# Altium PCB PCB1.PcbDoc
Units mm, origin at the board's own origin, x right, y up, seen from the top; angles counter-clockwise.
Board outline 50.16 x 26.29 mm, 4 copper layers (Top Layer, VCC, GND, Bottom Layer), stack 0.603 mm thick; 42 components, 30 nets, 169 pads, 31 vias.
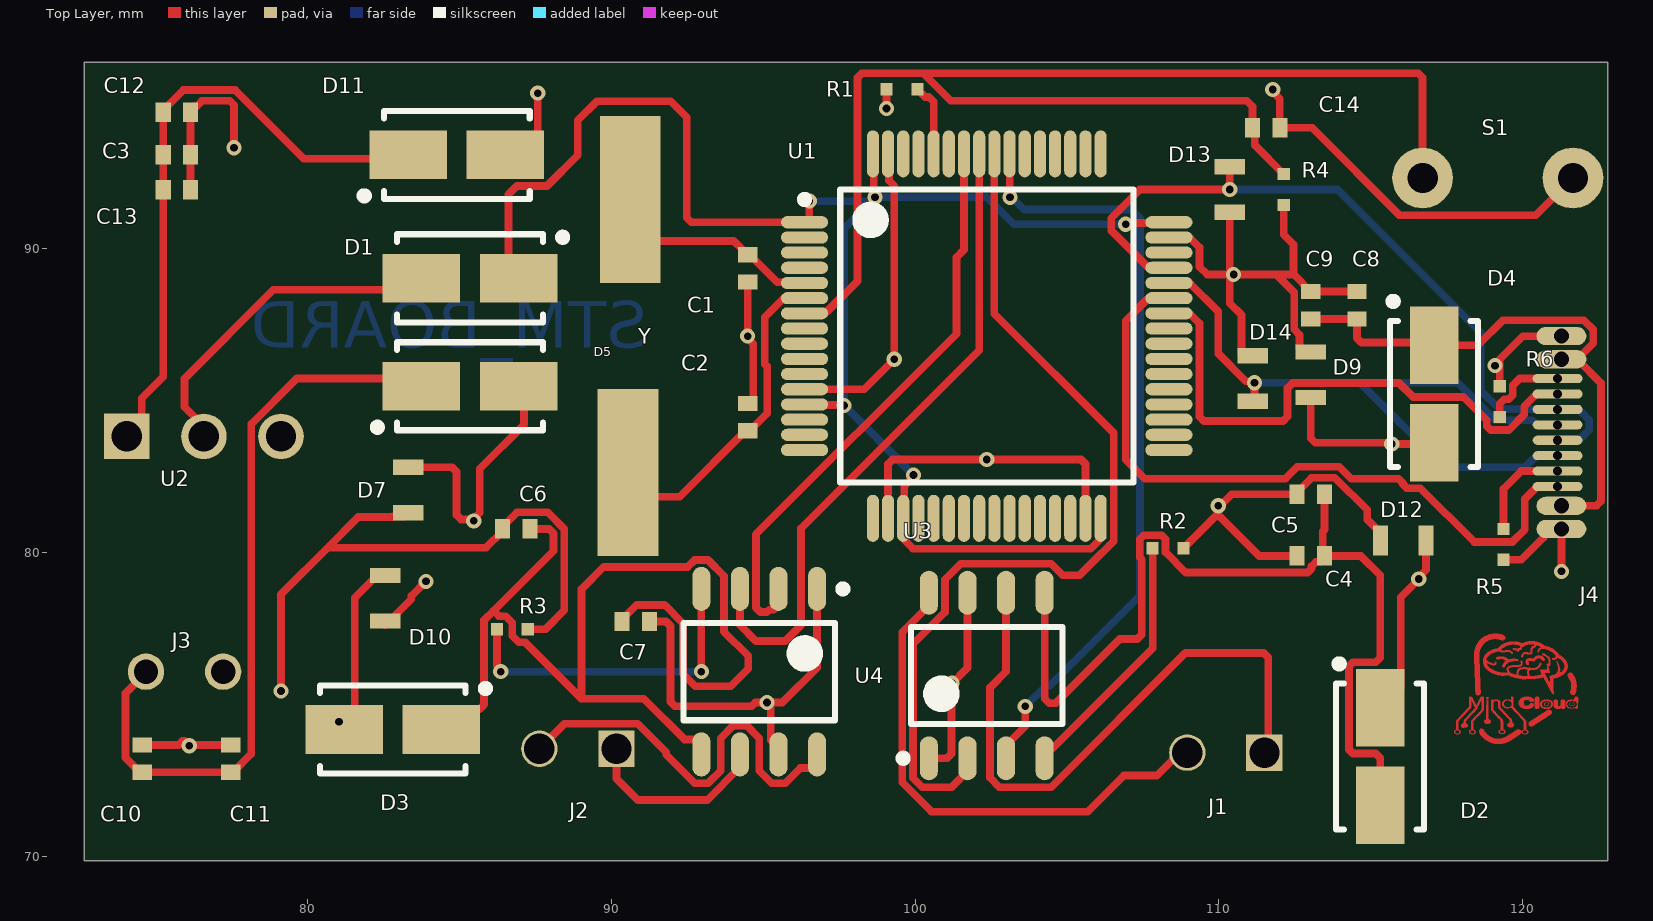
[diagram p0: Top Layer view]
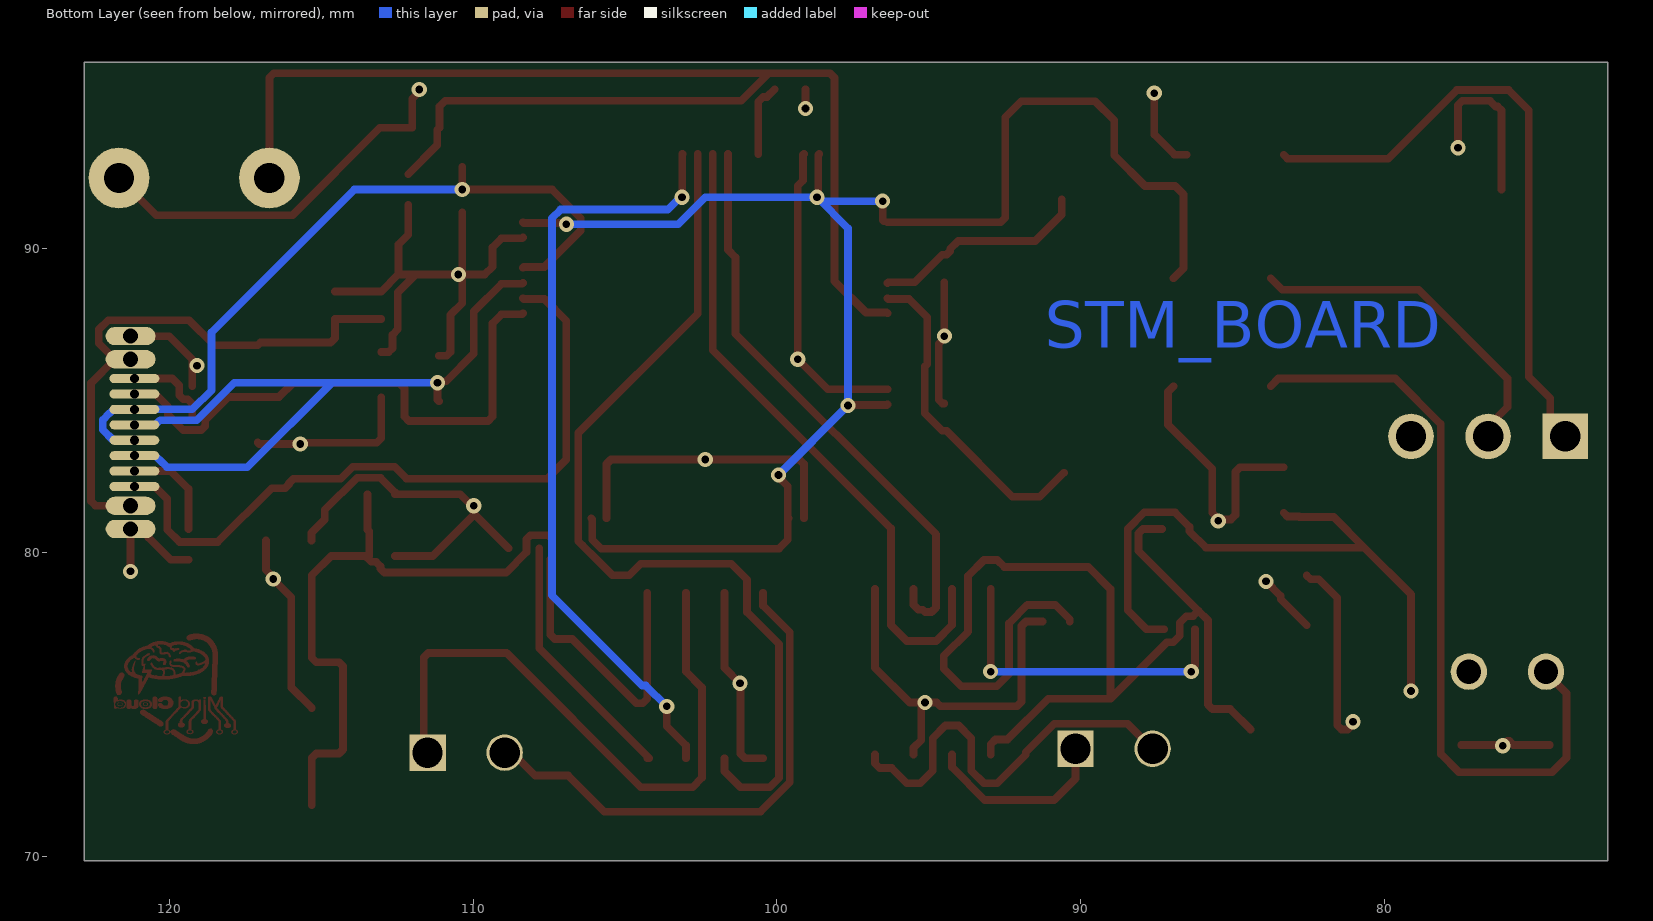
[diagram p1: Bottom Layer view, seen from below]
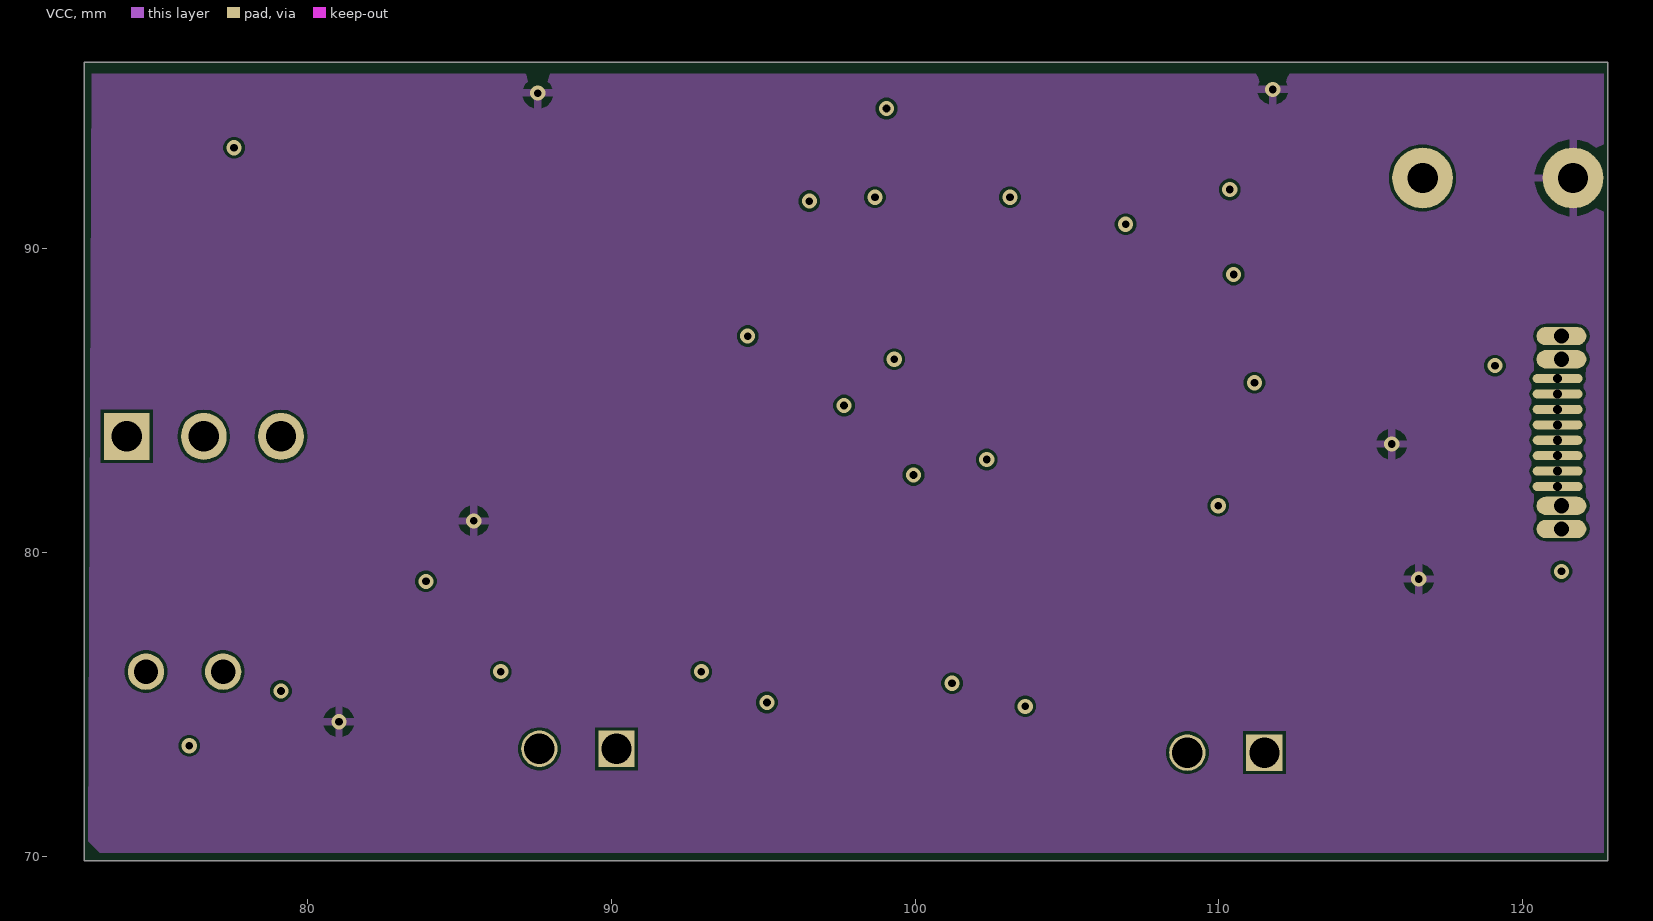
[diagram p2: VCC]
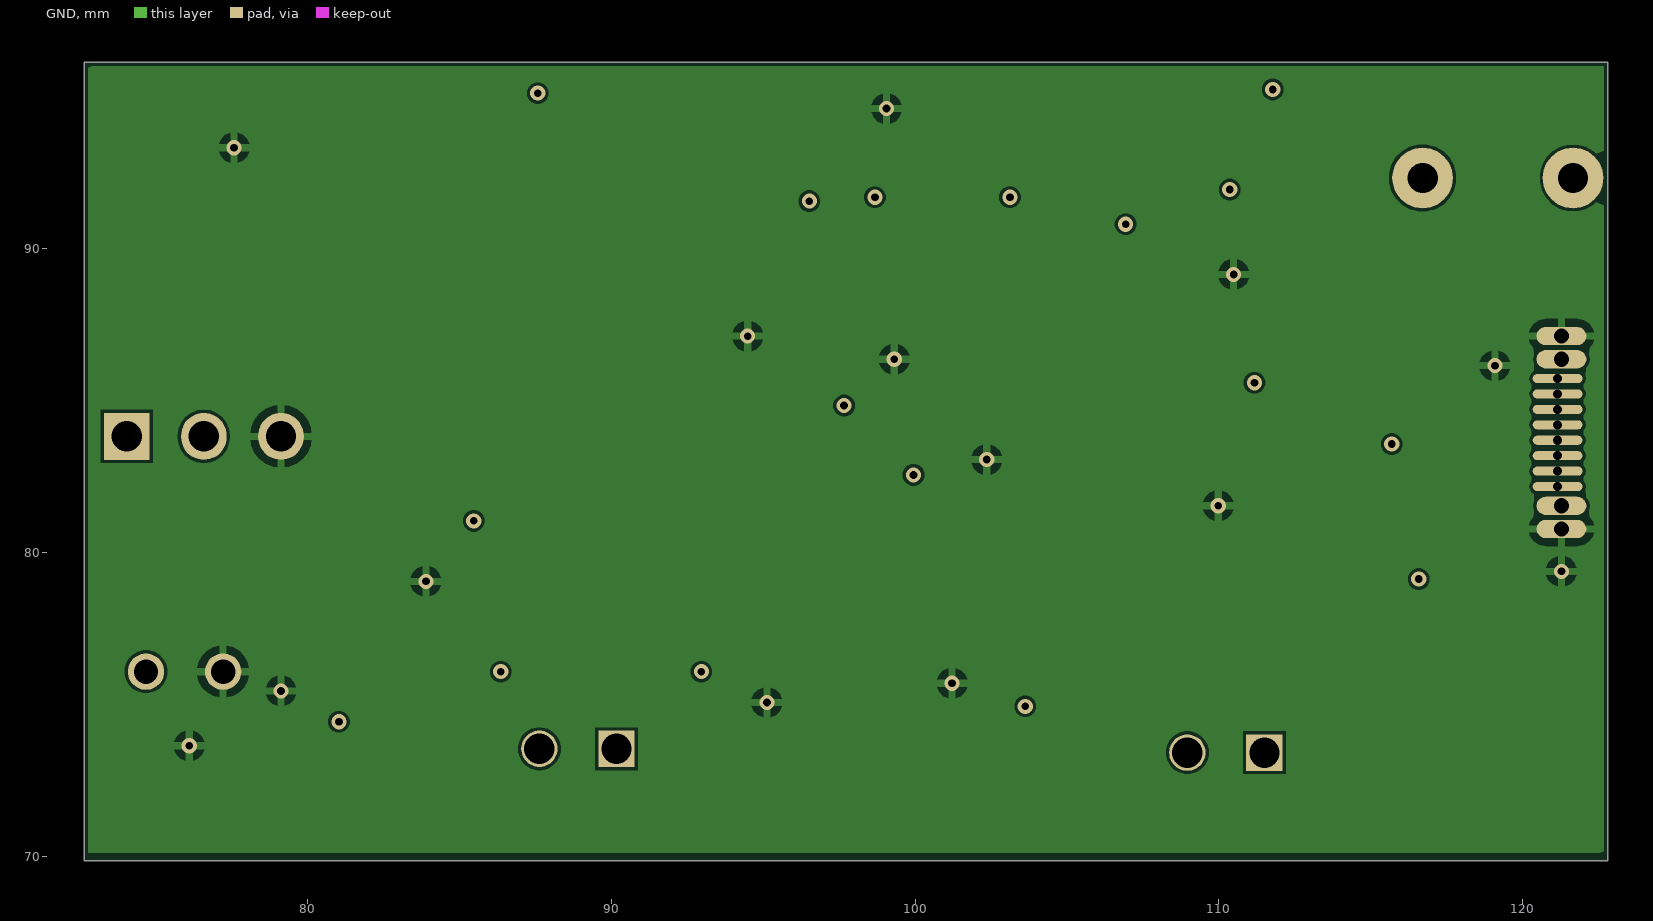
[diagram p3: GND]
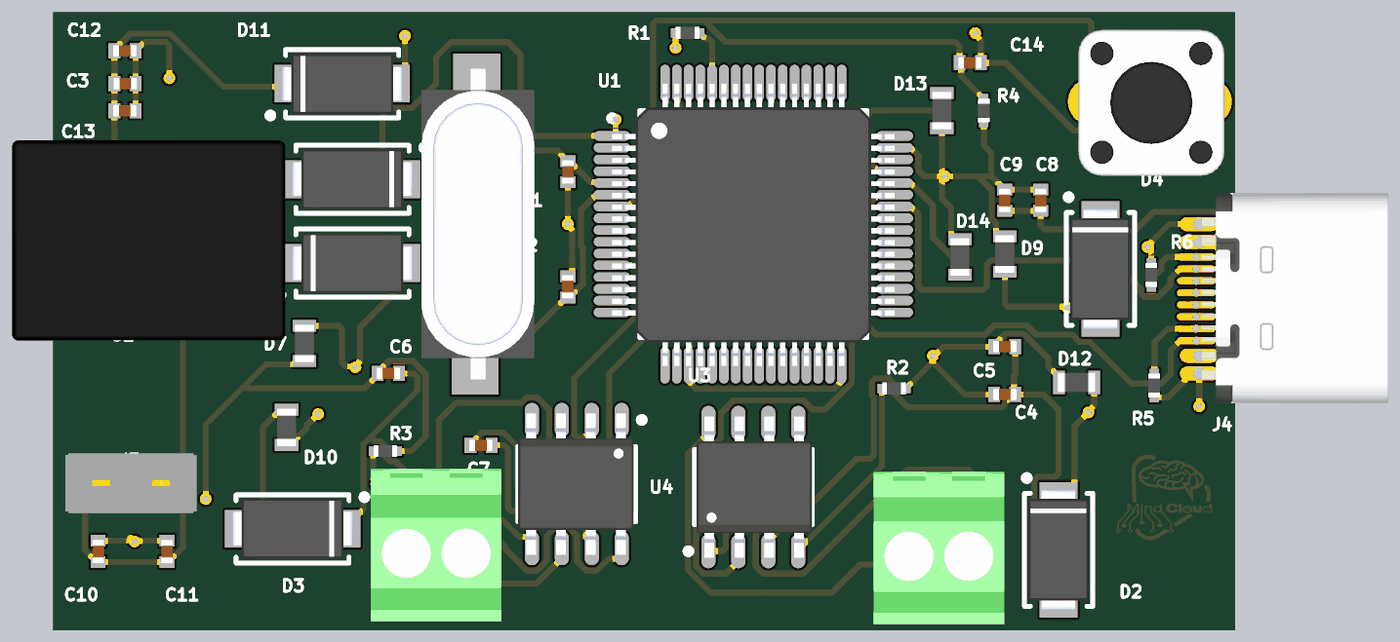
[diagram p4: 3D render of the assembled board from above, using the file's embedded part models]

## Layer stack, top to bottom
Top Solder: solder mask 0.0102, Solder Resist, Dk 3.5
Top Layer: signal copper 0.0356
Dielectric 2: prepreg 0.0711, PP-006, Dk 4.1
VCC: signal copper 0.035
Dielectric 1: dielectric 0.32, FR-4, Dk 4.8
GND: signal copper 0.035
Dielectric 3: prepreg 0.0711, PP-006, Dk 4.1
Bottom Layer: signal copper 0.0356
Bottom Solder: solder mask 0.0102, Solder Resist, Dk 3.5

## Board outline
72.644,69.85 122.809,69.85 122.809,96.139 72.644,96.139

## Design rules (kind name [scope] priority, off if disabled: settings)
Clearance [All] p1: gap=0.1 ignorepadtopadclearanceinfootprint=FALSE
PolygonConnect [All] p1: connectstyle=Relief reliefconductorwidth=0.254 reliefentries=4 polygonreliefangle="90 Angle" airgapwidth=0.254
RoutingVias [All] p1: holewidth=0.711 width=1.27 viastyle="Through Hole" minholewidth=0.711 minwidth=1.27 maxholewidth=0.711 maxwidth=1.27
SolderMaskExpansion [All] p1: expansion=0.102 istentingtop=FALSE
SupplyNets "Schematic Supply Nets_2" [InNet('VCC')] p1: voltage=0.000
SupplyNets "Schematic Supply Nets_1" [InNet('GND')] p2: voltage=0.000
SupplyNets "Schematic Supply Nets" [InNet('+3.3')] p3: voltage=0.000
UnRoutedNet UnRoutedNet_1 [All] p1:
UnRoutedNet [All] p2:
Width [All] p1: maxlimit=0.254 minlimit=0.254 preferedwidth=0.254
29 further rules are at their usual default settings.

## Components (designator, comment, footprint, x,y, rotation, side; value= is the part's Value field where it differs from the comment)
C1 "22pF" CAPACITOR 94.488,89.35 r270 top
C2 "22pF" CAPACITOR 94.488,84.455 r90 top
C3 "10uF" CAPACITOR 75.692,93.091 r0 top
C4 "4.7uF" CAPACITOR 113.03,79.883 r0 top
C5 "0.1uF" CAPACITOR 113.03,81.915 r0 top
C6 "4.7uF" CAPACITOR 86.868,80.772 r0 top
C7 "0.1uF" CAPACITOR 90.805,77.724 r180 top
C8 "0.1uF" CAPACITOR 114.554,88.138 r270 top
C9 "4.7uF" CAPACITOR 113.03,88.138 r270 top
C10 "4.7uF" CAPACITOR 74.549,73.21 r270 top
C11 "0.1uF" CAPACITOR 77.47,73.21 r270 top
C12 "0.1uF" CAPACITOR 75.692,94.488 r180 top
C13 "4.7uF" CAPACITOR 75.692,91.948 r180 top
C14 "0.1uF" CAPACITOR 111.564,93.98 r180 top
D1 "DIODE" DIODE 85.344,89.027 r0 top
D2 "DIODE" DIODE 115.316,73.279 r90 top
D3 "DIODE" DIODE 82.804,74.168 r0 top
D4 "DIODE" DIODE 117.094,85.217 r90 top
D5 "DIODE" DIODE 85.344,85.471 r180 top
D7 "TVS DIODE" "TVS DIODE" 83.312,82.054 r90 top
D9 "TVS DIODE" "TVS DIODE" 113.03,85.852 r90 top
D10 "TVS DIODE" "TVS DIODE" 82.55,78.486 r90 top
D11 "DIODE" DIODE 84.912,93.091 r180 top
D12 "TVS DIODE" "TVS DIODE" 116.078,80.391 r0 top
D13 "TVS DIODE" "TVS DIODE" 110.363,91.948 r270 top
D14 "TVS DIODE" "TVS DIODE" 111.125,85.725 r270 top
J1 "terminal block" "TERMINAL BLOCK" 111.506,73.406 r270 top
J2 "terminal block" "TERMINAL BLOCK" 90.17,73.533 r270 top
J3 "PLUGABLE BLOCK" PLUGABLE 75.692,72.43 r90 top
J4 "USB" DIP32 112.141,86.106 r0 top (schematic designator J?)
R1 "10K" Resistor 99.568,95.25 r180 top
R2 "10K" Resistor 108.331,80.137 r0 top
R3 "10K" Resistor 86.741,77.47 r0 top
R4 "10K" Resistor 112.141,91.948 r270 top
R5 "5.1K" Resistor 119.38,80.264 r90 top
R6 "5.1K" Resistor 119.253,84.963 r270 top
S1 "BUTTON" BUTTON 117.856,77.343 r90 top (schematic designator S?)
U1 "STM_CHIP" TSQFP50P1270X1270X160-64N 102.362,87.122 r0 top
U2 "REGULATOR" REGULATOR 74.041,83.82 r90 top
U3 "DRV8871" SOIC127P600X170-8N 102.362,75.946 r90 top
U4 "DRV8871" SOIC127P600X170-8N 94.869,76.073 r270 top
Y "CRYSTAL" CRYSTAL 90.678,85.09 r90 top

## Footprints (in the part's own frame and the unit in brackets; to place one, negate y for a bottom-side part, rotate by r counter-clockwise, add the part's x,y. Pads: shape width x height; smd on the part's side, far side on the other; paste and mask are expansions set on the pad)
BUTTON [mm]
  round 2 hole 1: 1(14.986,1.143) 2(14.986,-3.81)
  body extent 11.83,-4.5 18.03,1.7, height 4.8
CAPACITOR [mm]
  rect 0.5x0.64 smd: 1(-0.45,0) 2(0.45,0)
  body extent -0.49,-0.25 0.51,0.25, height 0.55
CRYSTAL [mm]
  rect 5.5x2 smd: 1(-2.464,0.127) 2(6.538,0.056)
  body extent -4.57,-2.39 8.63,2.41, height 4.3
DIODE [mm] "Molded Diode, 2-Leads, Body 4.37x2.62mm, IPC Medium Density"
  rect 2.55x1.6 smd: 1(-1.6,0) 2(1.6,0)
  silkscreen extent -2.4,-1.45 3.18,1.47, body extent -2.57,-1.27 2.57,1.29, height 2.5
DIP32 [mm]
  oval 1.64x0.6 hole 0.5: 1(9.144,-5.334) 2(9.144,-4.572) 11(9.144,0.254) 12(9.144,1.016)
  oval 1.64x0.3 hole 0.3: 3(9.017,-3.937) 4(9.017,-3.429) 5(9.017,-2.921) 6(9.017,-2.413) 7(9.017,-1.905) 8(9.017,-1.397) 9(9.017,-0.889) 10(9.017,-0.381)
  body extent 9.26,-6.6 17.16,2.35, height 3.16
PLUGABLE [mm]
  round 1.2 hole 0.8: 1(3.643,1.016) 2(3.643,-1.524)
  body extent 2.41,-3.05 4.95,2.54, height 13.51
REGULATOR [mm]
  rect 1.5x1.5 / inner rect 1.55x1.5 / far side rect 1.5x1.5 hole 1: 1(0,0)
  round 1.5 / inner oval 1.55x1.5 / far side round 1.5 hole 1: 2(0,-2.54) 3(0,-5.08)
  body extent -5.74,-8.47 6.86,3.13, height 17
Resistor [mm]
  rect 0.4x0.4 smd: 1(-0.508,0) 2(0.508,0)
  body extent -0.5,-0.25 0.5,0.25, height 0.37
SOIC127P600X170-8N [mm] "SOIC, 8-Leads, Body 4.90x3.90mm, Pitch 1.27mm, IPC Medium Density"
  oval 1.45x0.6 smd: 1(-2.725,1.905) 2(-2.725,0.635) 3(-2.725,-0.635) 4(-2.725,-1.905) 5(2.725,-1.905) 6(2.725,-0.635) 7(2.725,0.635) 8(2.725,1.905)
  silkscreen extent -2.85,-2.5 1.6,2.88, body extent -3,-2.49 3,2.41, height 1.7
"TERMINAL BLOCK" [mm]
  rect 1.2x1.2 hole 1: 1(0,0)
  round 1.2 hole 1: 2(0,-2.54)
  body extent -3.2,-4.04 3.3,1.5, height 10
TSQFP50P1270X1270X160-64N [mm] "TSQFP, 64-Leads, Body 10.00x10.00mm, Pitch 0.50mm, IPC Medium Density"
  oval 1.55x0.4 smd: 1(-6,3.75) 2(-6,3.25) 3(-6,2.75) 4(-6,2.25) 5(-6,1.75) 6(-6,1.25) 7(-6,0.75) 8(-6,0.25) 9(-6,-0.25) 10(-6,-0.75) 11(-6,-1.25) 12(-6,-1.75) 13(-6,-2.25) 14(-6,-2.75) 15(-6,-3.25) 16(-6,-3.75) 33(6,-3.75) 34(6,-3.25) 35(6,-2.75) 36(6,-2.25) 37(6,-1.75) 38(6,-1.25) 39(6,-0.75) 40(6,-0.25) 41(6,0.25) 42(6,0.75) 43(6,1.25) 44(6,1.75) 45(6,2.25) 46(6,2.75) 47(6,3.25) 48(6,3.75)
  oval 0.4x1.55 smd: 17(-3.75,-6) 18(-3.25,-6) 19(-2.75,-6) 20(-2.25,-6) 21(-1.75,-6) 22(-1.25,-6) 23(-0.75,-6) 24(-0.25,-6) 25(0.25,-6) 26(0.75,-6) 27(1.25,-6) 28(1.75,-6) 29(2.25,-6) 30(2.75,-6) 31(3.25,-6) 32(3.75,-6) 49(3.75,6) 50(3.25,6) 51(2.75,6) 52(2.25,6) 53(1.75,6) 54(1.25,6) 55(0.75,6) 56(0.25,6) 57(-0.25,6) 58(-0.75,6) 59(-1.25,6) 60(-1.75,6) 61(-2.25,6) 62(-2.75,6) 63(-3.25,6) 64(-3.75,6)
  silkscreen extent -6.12,-4.82 4.82,4.82, body extent -6,-6.03 6,5.97, height 1.6
"TVS DIODE" [mm] "Chip Diode, 2-Leads, Body 1.60x0.83mm, IPC Medium Density"
  rect 0.5x1 smd: 1(-0.75,0) 2(0.75,0)
  body extent -0.8,-0.41 0.8,0.41, height 0.55

## Part data
C1 C2 C3 C4 C5 C6 C7 C8 C9 C10 C11 C12 C13 C14: library part CAPACITOR, "50V 22pF C0G ±5% 0402 Multilayer Ceramic Capacitors MLCC - SMD/SMT ROHS", LCSC Part=C76960, Manufacturer="Murata Electronics", Mfr. Part=GRM1555C1H220JA01D, SUPPLIER=LCSC
D1 D2 D3 D4 D5 D11: "1A Independent Type 1.3V@1A 400V SMA(DO-214AC) Diodes - General Purpose ROHS", LCSC Part=C260336, Manufacturer=SMC, Mfr. Part=RS1G, SUPPLIER=LCSC
D7 D9 D10 D12 D13 D14: "45V 0603 ESD and Surge Protection (TVS/ESD) ROHS", LCSC Part=C2929617, Manufacturer=Littelfuse, Mfr. Part=PESD0603-240, SUPPLIER=LCSC
J1 J2: "Plugin Screw Terminal Blocks ROHS", LCSC Part=C592983, Manufacturer="TE Connectivity 282834-2", Mfr. Part=282834-2, SUPPLIER=LCSC
J3: "P=2.54mm Pluggable System Terminal Block ROHS", LCSC Part=C42371572, Manufacturer="Cixi Kefa Elec", Mfr. Part=KF2024-2.54-2P, SUPLLIER=LCSC
J4: "5A 1 16P Mother Type-C SMD USB Connectors ROHS", LCSC Part=C165948, Manufacturer="Korean Hroparts", Mfr. Part=TYPE-C-31-M-12, SUPPLIER=LCSC
R1 R2 R3 R4 R5 R6: library part RESISTOR, "Ceramic resistor ±1% 1206 Chip Resistor - Surface Mount ROHS", LCSC Part=C2912641, Manufacturer=Milliohm, Mfr. Part=HoCS1206-470mR-1%-TCR200, SUPPLIER=LCSC
U1: "ARM-M4 84MHz LQFP-64(10x10) Microcontrollers (MCU/MPU/SOC) ROHS", LCSC Part=C74524, Manufacturer=STMicroelectronics, Mfr. Part=STM32F401RCT6, SUPPLIER=LCSC
U2: "SIP,17.5x11.5mm Isolated Power Modules ROHS", LCSC Part=C7270711, Manufacturer="Recom Power", Mfr. Part=R-78B3.3-1.0L, SUPPLIER=LCSC
U3 U4: "3.6A Brushed DC Motor 6.8V~45V PWM SOIC-8-EP Motor Driver ICs ROHS", LCSC Part=C701805, Manufacturer="Texas Instruments", Mfr. Part=DRV8871DDARQ1, SUPPLIER=LCSC
Y: "16MHz 20pF ±30ppm ±50ppm HC-49S-SMD Crystals ROHS", LCSC Part=C6611805, Manufacturer=ECS, Mfr. Part=ECS-160-20-5PVX, SUPPLIER=LCSC

## Via types
v1: diameter 0.5, hole 0.254, Top Layer to Bottom Layer, 31 vias

## Nets (pads, with @x,y where several pads share a name; then routed paths per layer and width w, separated by ;. In a path a pad name is that pad's centre, name@x,y a point inside that pad or via, vN(x,y) a via of type N, cw(c..) or ccw(c..) an arc to the next point about the centre after c; other vN are vias at no path point)
+3.3: D1.2 U1.1 U1.13 U1.19 U1.32 U1.48 U1.64 | length 54.1
  Top Layer w0.254: D1.2 86.614,89.357 86.614,91.788 86.89,92.064 87.881,92.064 88.895,93.078 88.895,94.226 89.528,94.859 91.954,94.859 92.484,94.329 92.484,91.021 92.632,90.872 U1.1 ; U1.13 96.38,84.854 97.645,84.854 v1(97.663,84.836) ; U1.1@96.48,90.9 96.52,90.939 v1(96.52,91.567) ; U1.64 98.64,93.094 98.64,91.733 v1(98.679,91.694) ; v1(99.949,82.55) 99.949,82.483 99.64,82.174 99.64,81.15 U1.19 99.64,81.094 99.64,80.415 99.935,80.12 105.789,80.12 106.084,80.415 106.084,81.094 U1.32 ; v1(106.934,90.805) 106.973,90.844 108.334,90.844 U1.48
  Bottom Layer w0.254: v1(96.52,91.567) 98.485,91.567 98.612,91.694 v1(98.679,91.694) ; v1(99.949,82.55) v1(97.663,84.836) 97.663,90.678 v1(98.679,91.694) ; v1(106.934,90.805) 103.251,90.805 102.362,91.694 v1(98.679,91.694)
A9: J4.9 U1.42 | length 18.5
  Top Layer w0.254: U1.42 108.39,87.844 109.069,87.844 109.364,87.549 109.364,87.195 109.364,84.477 109.513,84.328 112.119,84.328 112.268,84.477 112.268,85.411 112.436,85.579 115.936,85.579 116.396,85.119 118.056,85.119 118.826,84.349 118.826,84.161 118.959,84.028 119.547,84.028 120.058,84.539 120.058,84.816 120.437,85.194 120.453,85.194 120.497,85.238 J4.9@121.121,85.238
A10: J4.3 U1.43 | length 23.3
  Top Layer w0.254: U1.43 108.334,88.344 107.655,88.344 106.934,87.623 106.934,83.058 107.569,82.423 112.197,82.423 112.59,82.816 113.971,82.816 114.364,82.423 115.918,82.423 116.067,82.274 116.067,82.248 116.2,82.115 116.64,82.115 118.41,80.345 119.674,80.345 120.077,80.748 120.077,81.758 120.488,82.169 J4.3
D_N: D14.2 J4.5 J4.7 U1.44 | length 24
  Top Layer w0.254: U1.44 108.39,88.844 109.069,88.844 109.981,87.932 109.981,86.548 110.893,85.636 111.13,85.636 v1(111.177,85.589) 111.177,85.027 D14.2
  Bottom Layer w0.254: v1(111.177,85.589) 114.653,85.589 ; J4.5 120.476,83.185 120.345,83.054 120.332,83.054 120.082,82.804 117.438,82.804 114.653,85.589 ; J4.7 120.476,84.201 120.345,84.332 120.332,84.332 120.309,84.355 119.106,84.355 117.872,85.589 114.653,85.589
D_P: D13.1 J4.6 J4.8 U1.45 | length 25.5
  Top Layer w0.254: U1.45 108.334,89.4 107.655,89.4 106.457,90.598 106.457,91.003 107.402,91.948 v1(110.363,91.948) D13.1
  Bottom Layer w0.254: v1(110.363,91.948) 113.919,91.948 118.618,87.249 118.618,85.344 119.253,84.709 J4.8 121.84,84.709 121.971,84.578 121.984,84.578 122.205,84.357 122.205,84.045 121.862,83.702 121.167,83.702 J4.6
GND: C1.2 C2.2 C3.2 C4.1 C5.1 C6.1 C7.1 C8.1 C9.1 C10.1 C11.1 C12.1 C13.1 D7.1 D9.2 D10.1 D12.1 D13.2 D14.1 J3.2 J4.1 J4.12 R1.2 R2.2 R3.2 R4.2 R5.1 R6.1 U1.12 U1.18 U1.31 U1.47 U1.63 U2.3 U3.1 U3.7 U4.1 U4.7 | length 113.8
  Top Layer w0.254: C10.1 75.752,73.66 75.879,73.787 75.946,73.787 v1(76.098,73.635) ; v1@76.14,73.66 C11.1 ; C13.1 C3.2 76.142,94.418 C12.1 76.142,94.558 76.265,94.681 76.335,94.681 76.523,94.869 77.428,94.869 77.577,94.72 v1(77.577,93.325) ; v1(79.121,75.438) 79.121,78.592 ; 79.121,78.617 80.657,80.153 85.869,80.153 86.418,80.702 C6.1 86.418,80.842 86.895,81.319 87.903,81.319 88.452,80.77 88.452,78.092 87.83,77.47 R3.2 ; 80.675,80.171 81.669,81.165 82.79,81.165 82.806,81.181 83.189,81.181 D7.1 ; D10.1@82.55,77.597 83.411,78.458 83.411,78.562 v1(83.895,79.046) ; C7.1 91.799,77.724 91.948,77.575 91.948,75.079 92.097,74.93 94.615,74.93 94.74,75.055 95.121,75.055 v1(95.123,75.057) ; C2.2 94.551,84.905 94.674,85.028 94.674,86.869 v1@94.488,87.055 ; v1(94.488,87.122) v1@94.488,87.055 ; C1.2 v1@94.488,87.055 ; U4.7 95.504,73.565 95.25,73.819 95.25,74.863 95.123,74.99 v1(95.123,75.057) ; U1.12 98.326,85.372 v1(99.314,86.36) 99.314,92.075 99.14,92.249 99.14,93.094 U1.63 ; U4.1 96.774,76.2 95.631,75.057 v1(95.123,75.057) ; v1(99.06,94.615) R1.2 ; U1.18 99.112,82.909 99.261,83.058 105.463,83.058 105.612,82.909 U1.31 ; U3.1 101.051,73.221 101.2,73.37 101.2,75.673 v1(101.219,75.692) 101.727,76.2 U3.7 ; U1.47 108.39,90.344 109.068,90.344 109.113,90.299 109.364,90.049 109.364,89.408 109.618,89.154 v1(110.49,89.154) ; R2.2 109.935,81.233 ; D13.2 110.363,89.348 110.49,89.221 v1(110.49,89.154) ; v1@110.49,89.142 110.49,89.087 110.363,88.96 110.363,88.208 110.752,87.819 110.752,86.598 110.875,86.475 D14.1 ; R4.2 112.141,90.459 112.464,90.135 112.464,89.154 ; C4.1 111.332,79.883 109.982,81.233 v1(109.982,81.534) 110.049,81.534 110.43,81.915 C5.1 ; C5.1@112.58,81.985 113.057,82.462 113.824,82.462 114.887,81.399 114.887,81.082 115.328,80.641 D12.1 ; D9.2 112.78,86.602 112.657,86.725 112.657,87.17 112.483,87.344 112.483,88.558 111.887,89.154 ; C8.1 C9.1 112.464,89.154 ; v1(119.095,86.15) v1@119.253,86.15 ; R6.1 v1@119.253,86.15 ; R5.1 119.961,79.756 120.699,80.494 120.699,80.612 120.859,80.772 J4.1 v1(121.285,79.375) ; J4.12 120.015,87.122 119.253,86.36 v1@119.253,86.15 ; v1(110.49,89.154) 111.887,89.154 ; 111.887,89.154 112.464,89.154
  other v1: 102.362,83.058
M1IN1: U1.55 U3.3 | length 25.7
  Top Layer w0.254: U3.3 102.997,73.646 103.632,74.281 v1(103.632,74.93) ; U1.55 103.118,93.116 103.118,91.7 v1(103.124,91.694)
  Bottom Layer w0.254: v1(103.124,91.694) 103.191,91.694 103.597,91.288 107.126,91.288 107.411,91.003 107.411,78.594 104.431,75.614 104.316,75.614 v1(103.632,74.93)
M1IN2: U1.56 U3.2 | length 30.3
  Top Layer w0.254: U3.2 101.727,72.796 101.2,72.269 100.239,72.269 99.93,72.578 99.93,76.974 100.984,78.028 100.984,79.098 101.509,79.623 104.485,79.623 104.86,79.248 105.417,79.248 105.935,79.766 ; U1.56 102.612,87.857 106.539,83.93 106.539,80.37 106.393,80.224 ; 105.935,79.766 106.393,80.224
M1OUT1: J1.1 U3.6 | length 20.7
  Top Layer w0.254: U3.6 102.997,76.08 102.47,75.553 102.47,72.578 102.779,72.269 104.485,72.269 108.903,76.687 111.484,76.687 111.633,76.538 111.633,73.533 J1.1
M1OUT2: J1.2 U3.8 | length 17.2
  Top Layer w0.254: U3.8 100.457,78.246 99.576,77.365 99.576,72.431 100.544,71.463 105.689,71.463 106.876,72.65 107.956,72.65 108.712,73.406 J1.2
M2IN1: U1.57 U4.3 | length 21.6
  Top Layer w0.254: U4.3 94.234,77.611 94.761,77.084 95.722,77.084 96.247,77.609 96.247,80.793 102.112,86.658 U1.57
M2IN2: U1.58 U4.2 | length 19.2
  Top Layer w0.254: U4.2 95.504,78.279 95.344,78.12 95.344,78.111 95.195,78.111 95.12,78.036 94.91,78.036 94.761,78.185 94.761,80.592 101.367,87.198 101.367,89.716 101.612,89.961 U1.58
M2OUT1: J2.1 U4.6 | length 6.2
  Top Layer w0.254: J2.1 90.17,72.552 90.878,71.844 93.155,71.844 94.234,72.923 U4.6
M2OUT2: J2.2 U4.8 | length 13.7
  Top Layer w0.254: J2.2 88.457,74.36 90.864,74.36 91.805,73.419 91.805,73.337 92.746,72.396 93.182,72.396 93.599,72.813 93.599,73.883 94.016,74.3 94.452,74.3 94.869,73.883 94.869,72.813 95.286,72.396 95.722,72.396 96.224,72.898 96.614,72.898 96.774,73.058 U4.8
NetC1_1: C1.1 U1.5 Y.2 | length 7.1
  Top Layer w0.254: Y.2 90.622,91.126 91.495,90.253 94.035,90.253 94.295,89.993 94.295,89.923 94.418,89.8 C1.1 ; C1.1@94.558,89.8 95.458,88.9 96.334,88.9 U1.5
NetC2_1: C2.1 U1.6 Y.1 | length 10.8
  Top Layer w0.254: Y.1 91.344,81.833 92.246,81.833 94.418,84.005 94.558,84.005 95.133,84.58 95.133,86.118 95.05,86.201 95.05,87.739 U1.6@95.61,88.299 ; U1.6@95.655,88.344 96.334,88.344 U1.6
NetC3_1: C3.1 C12.2 C13.2 D11.2 U2.1 | length 20.6
  Top Layer w0.254: U2.1 74.537,84.316 74.537,85.078 75.242,85.783 C13.2 C3.1 C12.2 75.242,94.558 75.907,95.223 77.617,95.223 79.876,92.964 83.185,92.964 D11.2
NetC4_2: C4.2 C5.2 D2.1 U3.5 | length 31.5
  Top Layer w0.254: U3.5 104.267,75.184 104.416,75.035 104.626,75.035 106.738,77.147 107.32,77.147 107.469,77.296 107.469,79.77 107.396,79.843 107.396,80.431 107.529,80.564 108.117,80.564 108.25,80.431 108.25,80.005 108.919,79.336 112.924,79.336 113.057,79.469 113.057,79.541 113.206,79.69 113.357,79.69 113.48,79.813 C4.2 114.681,79.883 115.316,79.248 115.316,76.53 115.167,76.381 114.422,76.381 114.289,76.248 114.289,73.51 114.422,73.377 115.167,73.377 115.316,73.228 D2.1 ; C4.2@113.422,79.883 113.422,80.687 113.48,80.745 C5.2
NetC6_2: C6.2 C7.2 D3.2 U4.5 | length 37.4
  Top Layer w0.254: D3.2 85.077,74.841 85.657,74.841 85.806,74.99 85.806,77.764 86.121,78.079 ; C6.2 87.949,80.772 88.098,80.623 88.098,80.056 86.121,78.079 ; C7.2 90.355,77.794 90.832,78.271 91.753,78.271 92.356,77.668 92.356,76.006 92.766,75.596 93.929,75.596 94.507,76.174 94.507,76.593 93.707,77.393 93.707,79.225 93.182,79.75 92.746,79.75 92.518,79.522 89.745,79.522 89.016,78.793 89.016,75.184 ; U4.5 92.964,73.679 92.804,73.839 92.411,73.839 91.066,75.184 89.016,75.184 ; 86.121,78.079 86.303,77.897 86.527,77.897 86.741,77.683 86.741,77.257 86.955,77.043 87.157,77.043 89.016,75.184
NetC8_2: C8.2 C9.2 D4.2 J4.2 J4.11 | length 18.6
  Top Layer w0.254: C9.2 C8.2 114.554,87.057 114.703,86.908 117.003,86.908 D4.2 118.528,86.817 119.36,87.649 122.023,87.649 122.332,87.34 122.332,86.887 J4.11@121.805,86.36 ; J4.2 122.437,81.534 122.586,81.683 122.586,85.579 J4.11@121.805,86.36 ; J4.11 J4.11@121.805,86.36
NetC10_2: C10.2 C11.2 D5.2 J3.1 | length 24.9
  Top Layer w0.254: J3.1 74.676,76.034 74.002,75.36 74.002,73.237 74.479,72.76 C10.2 C11.2 77.54,72.76 78.144,73.364 78.144,84.225 79.644,85.725 83.49,85.725 D5.2
NetD1_1: D1.1 U2.2 | length 11.3
  Top Layer w0.254: U2.2 76.581,84.149 75.946,84.784 75.946,85.725 78.867,88.646 83.363,88.646 D1.1
NetF?_14: 
NetJ?_4: J4.4 R5.2 | length 3.3
  Top Layer w0.254: R5.2 119.38,82.1 119.957,82.677 J4.4
NetJ?_10: J4.10 R6.2 | length 2.9
  Top Layer w0.254: R6.2 119.253,84.895 119.402,85.044 119.547,85.044 119.68,85.177 119.68,85.495 119.91,85.725 J4.10
NetR1_1: R1.1 U1.60 | length 2.4
  Top Layer w0.254: R1.1 100.329,94.997 100.456,94.997 100.612,94.841 U1.60
NetR2_1: R2.1 U3.4 | length 8.5
  Top Layer w0.254: U3.4 104.201,73.221 107.823,76.843 R2.1
NetR3_1: R3.1 U4.4 | length 10.8
  Top Layer w0.254: R3.1 86.233,76.267 86.36,76.14 v1(86.36,76.073) ; v1(92.964,76.073) U4.4
  Bottom Layer w0.254: v1(86.36,76.073) v1(92.964,76.073)
RST: C14.2 R4.1 S1.1 U1.7 | length 44.9
  Top Layer w0.254: U1.7 96.39,87.9 97.069,87.9 98.104,88.935 98.104,95.633 98.252,95.781 100.266,95.781 ; R4.1 111.183,93.414 111.183,93.911 C14.2 111.114,94.681 110.926,94.869 101.178,94.869 100.266,95.781 ; S1.1 116.713,95.633 116.564,95.781 100.266,95.781
VCC: C14.1 D2.2 D3.1 D4.1 D5.1 D7.2 D9.1 D10.2 D11.1 D12.2 S1.2 | length 42.3
  Top Layer w0.254: v1(81.03,74.423) 81.03,74.342 D3.1 81.407,74.168 81.55,74.311 81.55,78.502 82.161,79.113 82.427,79.113 D10.2 ; D7.2 84.751,82.804 84.9,82.655 84.9,81.234 85.049,81.085 85.424,81.085 v1(85.471,81.038) 85.471,81.105 85.669,81.303 85.669,82.748 87.122,84.201 87.122,85.293 D5.1 ; D11.1 86.906,93.091 87.579,93.764 v1(87.579,95.123) ; v1(111.779,95.243) 111.779,95.177 112.014,94.941 C14.1 113.073,93.98 115.951,91.102 120.439,91.102 S1.2 ; D9.1 113.03,83.762 113.179,83.613 115.65,83.613 v1(115.697,83.566) ; D2.2 115.989,75.552 115.989,78.524 v1(116.586,79.121) 116.586,79.188 116.828,79.43 D12.2 ; v1@115.583,83.566 117.043,83.566 D4.1
pads on no net: U1.2 U1.3 U1.4 U1.8 U1.9 U1.10 U1.11 U1.14 U1.15 U1.16 U1.17 U1.20 U1.21 U1.22 U1.23 U1.24 U1.25 U1.26 U1.27 U1.28 U1.29 U1.30 U1.33 U1.34 U1.35 U1.36 U1.37 U1.38 U1.39 U1.40 U1.41 U1.46 U1.49 U1.50 U1.51 U1.52 U1.53 U1.54 U1.59 U1.61 U1.62

## Polygon pours and split planes (outlines as drawn)
VCC on VCC "VCC_L02_P001" (solid, remove dead copper, pour order 1): 72.898,95.758 122.682,95.758 122.682,70.104 73.152,70.104 72.771,70.485
GND on GND "GND_L03_P000" (solid, pour order 0): 72.771,96.139 72.898,96.012 122.682,96.012 122.682,69.977 122.555,70.104 72.771,70.104

## Other copper
Top Layer:
  drawing of 19 lines, arcs and shapes, not listed
Bottom Layer:
  text "STM_BOARD" at 91.186,86.741 h1.52